# EAGLE board SmartTraffic (EAGLE 9.6.2)
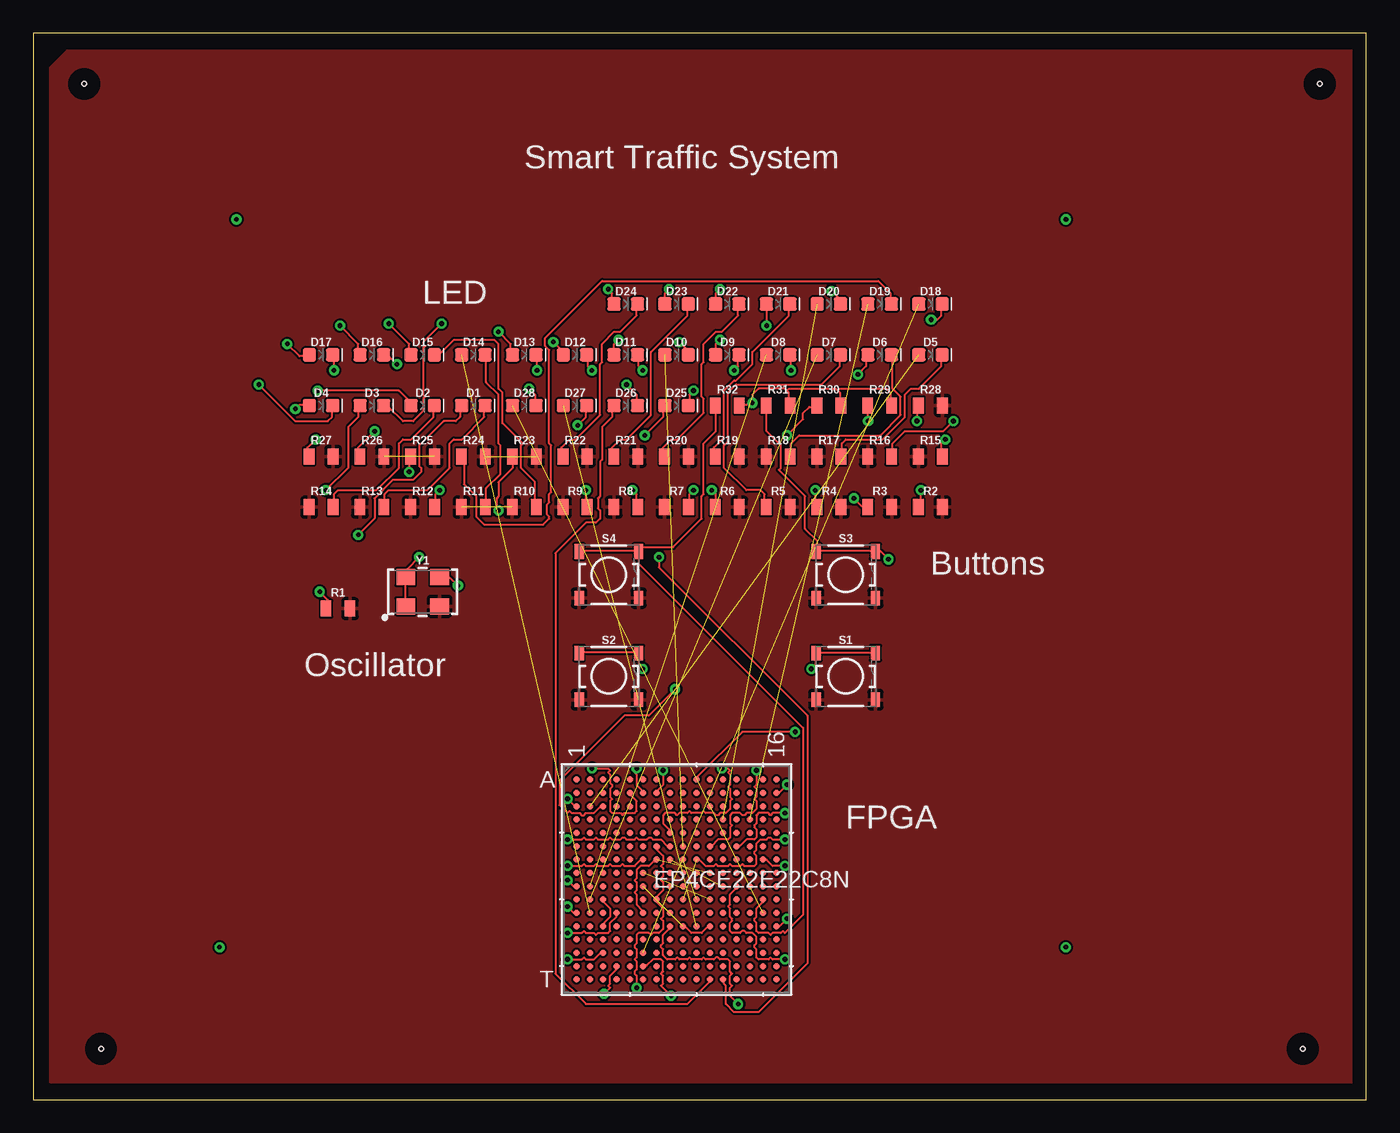
[diagram p0: board, top side]
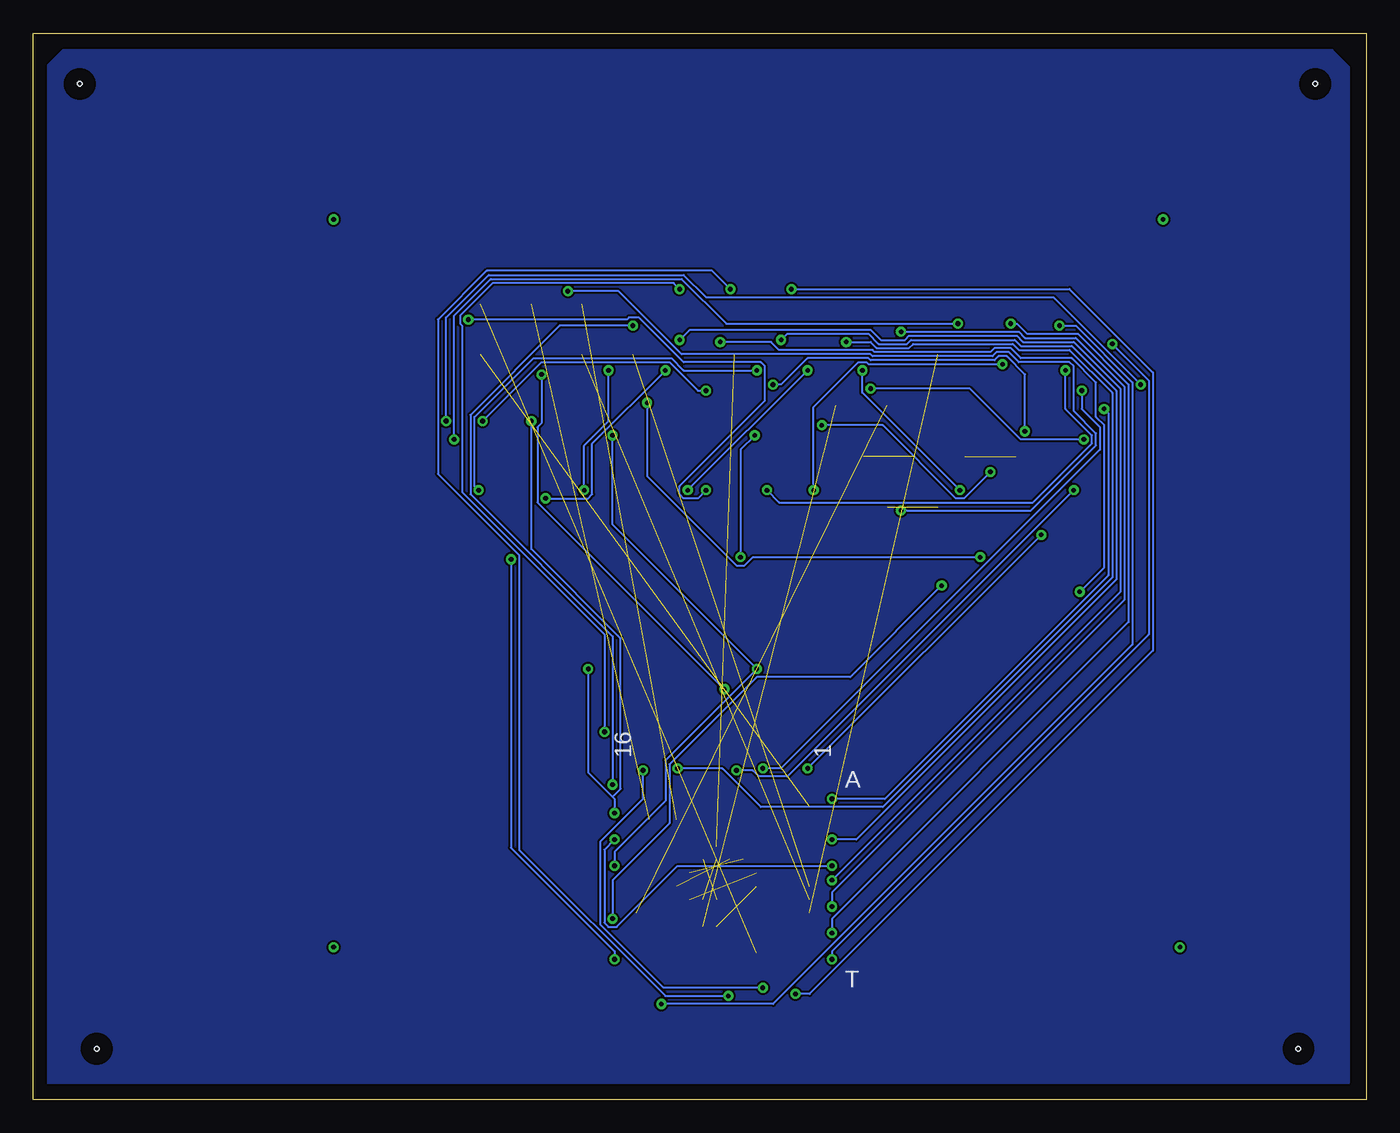
[diagram p1: board, bottom side, seen from below]

Size 100 x 80 mm. Coordinates in mm from the lower left corner, seen from the top.
Outline: 0,0 100,0 100,80 0,80 0,0
Copper layers (1*16): Top 0.035mm / dielectric 1.5mm / Bottom 0.035mm
Design rules "default": minimum track width 6mil, minimum drill 0.35mm, track to track 6mil, track to pad 6mil, pad to pad 6mil, via to via 6mil, smd to smd 6mil, copper to edge 40mil, drill to drill 6mil, minimum pad ring 10mil, minimum via ring 8mil, stop-mask expansion 4mil, vias tented up to drill 0mil, thermal gap 10mil
Holes 0.35 mm at 3.81,76.2 96.52,76.2 95.25,3.81 5.08,3.81

## Footprints (pad centres in the part's own frame; a part is rotated, then mirrored left to right if it is on the bottom)
LED-0603 = smd 1 x 1: A -0.877,0; C 0.877,0
0805 = smd 0.8 x 1.2: 1 -0.9,0; 2 0.9,0
TACTILE_SWITCH_SMD_4.5MM = smd 0.7 x 1.1: 1 2.225,1.75; 2 2.225,-1.75; 3 -2.225,-1.75; 4 -2.225,1.75
FBGA256_THIN_WIRE-BOND-A:1.55_ = smd 0.483 x 0.483: A1 -7.5,7.5; A2 -6.5,7.5; A3 -5.5,7.5; A4 -4.5,7.5; A5 -3.5,7.5; A6 -2.5,7.5; A7 -1.5,7.5; A8 -0.5,7.5; A9 0.5,7.5; A10 1.5,7.5; A11 2.5,7.5; A12 3.5,7.5; A13 4.5,7.5; A14 5.5,7.5; A15 6.5,7.5; A16 7.5,7.5; B1 -7.5,6.5; B2 -6.5,6.5; B3 -5.5,6.5; B4 -4.5,6.5; B5 -3.5,6.5; B6 -2.5,6.5; B7 -1.5,6.5; B8 -0.5,6.5; B9 0.5,6.5; B10 1.5,6.5; B11 2.5,6.5; B12 3.5,6.5; B13 4.5,6.5; B14 5.5,6.5; B15 6.5,6.5; B16 7.5,6.5; C1 -7.5,5.5; C2 -6.5,5.5; C3 -5.5,5.5; C4 -4.5,5.5; C5 -3.5,5.5; C6 -2.5,5.5; C7 -1.5,5.5; C8 -0.5,5.5; C9 0.5,5.5; C10 1.5,5.5; C11 2.5,5.5; C12 3.5,5.5; C13 4.5,5.5; C14 5.5,5.5; C15 6.5,5.5; C16 7.5,5.5; D1 -7.5,4.5; D2 -6.5,4.5; D3 -5.5,4.5; D4 -4.5,4.5; D5 -3.5,4.5; D6 -2.5,4.5; D7 -1.5,4.5; D8 -0.5,4.5; D9 0.5,4.5; D10 1.5,4.5; D11 2.5,4.5; D12 3.5,4.5; D13 4.5,4.5; D14 5.5,4.5; D15 6.5,4.5; D16 7.5,4.5; E1 -7.5,3.5; E2 -6.5,3.5; E3 -5.5,3.5; E4 -4.5,3.5; E5 -3.5,3.5; E6 -2.5,3.5; E7 -1.5,3.5; E8 -0.5,3.5; E9 0.5,3.5; E10 1.5,3.5; E11 2.5,3.5; E12 3.5,3.5; E13 4.5,3.5; E14 5.5,3.5; E15 6.5,3.5; E16 7.5,3.5; F1 -7.5,2.5; F2 -6.5,2.5; F3 -5.5,2.5; F4 -4.5,2.5; F5 -3.5,2.5; F6 -2.5,2.5; F7 -1.5,2.5; F8 -0.5,2.5; F9 0.5,2.5; F10 1.5,2.5; F11 2.5,2.5; F12 3.5,2.5; F13 4.5,2.5; F14 5.5,2.5; F15 6.5,2.5; F16 7.5,2.5; G1 -7.5,1.5; G2 -6.5,1.5; G3 -5.5,1.5; G4 -4.5,1.5; G5 -3.5,1.5; G6 -2.5,1.5; G7 -1.5,1.5; G8 -0.5,1.5; G9 0.5,1.5; G10 1.5,1.5; G11 2.5,1.5; G12 3.5,1.5; G13 4.5,1.5; G14 5.5,1.5; G15 6.5,1.5; G16 7.5,1.5; H1 -7.5,0.5; H2 -6.5,0.5; H3 -5.5,0.5; H4 -4.5,0.5; H5 -3.5,0.5; H6 -2.5,0.5; H7 -1.5,0.5; H8 -0.5,0.5; H9 0.5,0.5; H10 1.5,0.5; H11 2.5,0.5; H12 3.5,0.5; H13 4.5,0.5; H14 5.5,0.5; H15 6.5,0.5; H16 7.5,0.5; J1 -7.5,-0.5; J2 -6.5,-0.5; J3 -5.5,-0.5; J4 -4.5,-0.5; J5 -3.5,-0.5; J6 -2.5,-0.5; J7 -1.5,-0.5; J8 -0.5,-0.5; J9 0.5,-0.5; J10 1.5,-0.5; J11 2.5,-0.5; J12 3.5,-0.5; J13 4.5,-0.5; J14 5.5,-0.5; J15 6.5,-0.5; J16 7.5,-0.5; K1 -7.5,-1.5; K2 -6.5,-1.5; K3 -5.5,-1.5; K4 -4.5,-1.5; K5 -3.5,-1.5; K6 -2.5,-1.5; K7 -1.5,-1.5; K8 -0.5,-1.5; K9 0.5,-1.5; K10 1.5,-1.5; K11 2.5,-1.5; K12 3.5,-1.5; K13 4.5,-1.5; K14 5.5,-1.5; K15 6.5,-1.5; K16 7.5,-1.5; L1 -7.5,-2.5; L2 -6.5,-2.5; L3 -5.5,-2.5; L4 -4.5,-2.5; L5 -3.5,-2.5; L6 -2.5,-2.5; L7 -1.5,-2.5; L8 -0.5,-2.5; L9 0.5,-2.5; L10 1.5,-2.5; L11 2.5,-2.5; L12 3.5,-2.5; L13 4.5,-2.5; L14 5.5,-2.5; L15 6.5,-2.5; L16 7.5,-2.5; M1 -7.5,-3.5; M2 -6.5,-3.5; M3 -5.5,-3.5; M4 -4.5,-3.5; M5 -3.5,-3.5; M6 -2.5,-3.5; M7 -1.5,-3.5; M8 -0.5,-3.5; M9 0.5,-3.5; M10 1.5,-3.5; M11 2.5,-3.5; M12 3.5,-3.5; M13 4.5,-3.5; M14 5.5,-3.5; M15 6.5,-3.5; M16 7.5,-3.5; N1 -7.5,-4.5; N2 -6.5,-4.5; N3 -5.5,-4.5; N4 -4.5,-4.5; N5 -3.5,-4.5; N6 -2.5,-4.5; N7 -1.5,-4.5; N8 -0.5,-4.5; N9 0.5,-4.5; N10 1.5,-4.5; N11 2.5,-4.5; N12 3.5,-4.5; N13 4.5,-4.5; N14 5.5,-4.5; N15 6.5,-4.5; N16 7.5,-4.5; P1 -7.5,-5.5; P2 -6.5,-5.5; P3 -5.5,-5.5; P4 -4.5,-5.5; P5 -3.5,-5.5; P6 -2.5,-5.5; P7 -1.5,-5.5; P8 -0.5,-5.5; P9 0.5,-5.5; P10 1.5,-5.5; P11 2.5,-5.5; P12 3.5,-5.5; P13 4.5,-5.5; P14 5.5,-5.5; P15 6.5,-5.5; P16 7.5,-5.5; R1 -7.5,-6.5; R2 -6.5,-6.5; R3 -5.5,-6.5; R4 -4.5,-6.5; R5 -3.5,-6.5; R6 -2.5,-6.5; R7 -1.5,-6.5; R8 -0.5,-6.5; R9 0.5,-6.5; R10 1.5,-6.5; R11 2.5,-6.5; R12 3.5,-6.5; R13 4.5,-6.5; R14 5.5,-6.5; R15 6.5,-6.5; R16 7.5,-6.5; T1 -7.5,-7.5; T2 -6.5,-7.5; T3 -5.5,-7.5; T4 -4.5,-7.5; T5 -3.5,-7.5; T6 -2.5,-7.5; T7 -1.5,-7.5; T8 -0.5,-7.5; T9 0.5,-7.5; T10 1.5,-7.5; T11 2.5,-7.5; T12 3.5,-7.5; T13 4.5,-7.5; T14 5.5,-7.5; T15 6.5,-7.5; T16 7.5,-7.5
OSCILLATOR-SMD-5X3.2 = smd 1.397 x 1.194: 1 -1.27,-1.1; 2 1.27,-1.1; 3 1.27,1.1; 4 -1.27,1.1

## Placement (x,y rotation side)
D1  GREEN  [LED-0603]  33.02,52.07 0 top
D2  GREEN  [LED-0603]  29.21,52.07 0 top
D3  GREEN  [LED-0603]  25.4,52.07 0 top
D4  GREEN  [LED-0603]  21.59,52.07 0 top
D5  GREEN  [LED-0603]  67.31,55.88 0 top
D6  GREEN  [LED-0603]  63.5,55.88 0 top
D7  GREEN  [LED-0603]  59.69,55.88 0 top
D8  GREEN  [LED-0603]  55.88,55.88 0 top
D9  GREEN  [LED-0603]  52.07,55.88 0 top
D10  GREEN  [LED-0603]  48.26,55.88 0 top
D11  GREEN  [LED-0603]  44.45,55.88 0 top
D12  GREEN  [LED-0603]  40.64,55.88 0 top
D13  RED  [LED-0603]  36.83,55.88 0 top
D14  RED  [LED-0603]  33.02,55.88 0 top
D15  RED  [LED-0603]  29.21,55.88 0 top
D16  RED  [LED-0603]  25.4,55.88 0 top
D17  RED  [LED-0603]  21.59,55.88 0 top
D18  RED  [LED-0603]  67.31,59.69 0 top
D19  RED  [LED-0603]  63.5,59.69 0 top
D20  RED  [LED-0603]  59.69,59.69 0 top
D21  RED  [LED-0603]  55.88,59.69 0 top
D22  RED  [LED-0603]  52.07,59.69 0 top
D23  RED  [LED-0603]  48.26,59.69 0 top
D24  RED  [LED-0603]  44.45,59.69 0 top
D25  Yellow  [LED-0603]  48.26,52.07 0 top
D26  Yellow  [LED-0603]  44.45,52.07 0 top
D27  Yellow  [LED-0603]  40.64,52.07 0 top
D28  Yellow  [LED-0603]  36.83,52.07 0 top
R1  220  [0805]  22.86,36.83 0 top
R2  220  [0805]  67.31,44.45 0 top
R3  220  [0805]  63.5,44.45 0 top
R4  220  [0805]  59.69,44.45 0 top
R5  220  [0805]  55.88,44.45 0 top
R6  220  [0805]  52.07,44.45 0 top
R7  220  [0805]  48.26,44.45 0 top
R8  220  [0805]  44.45,44.45 0 top
R9  220  [0805]  40.64,44.45 0 top
R10  220  [0805]  36.83,44.45 0 top
R11  220  [0805]  33.02,44.45 0 top
R12  220  [0805]  29.21,44.45 0 top
R13  220  [0805]  25.4,44.45 0 top
R14  220  [0805]  21.59,44.45 0 top
R15  220  [0805]  67.31,48.26 0 top
R16  220  [0805]  63.5,48.26 0 top
R17  220  [0805]  59.69,48.26 0 top
R18  220  [0805]  55.88,48.26 0 top
R19  220  [0805]  52.07,48.26 0 top
R20  220  [0805]  48.26,48.26 0 top
R21  220  [0805]  44.45,48.26 0 top
R22  220  [0805]  40.64,48.26 0 top
R23  220  [0805]  36.83,48.26 0 top
R24  220  [0805]  33.02,48.26 0 top
R25  220  [0805]  29.21,48.26 0 top
R26  220  [0805]  25.4,48.26 0 top
R27  220  [0805]  21.59,48.26 0 top
R28  220  [0805]  67.31,52.07 0 top
R29  220  [0805]  63.5,52.07 0 top
R30  220  [0805]  59.69,52.07 0 top
R31  220  [0805]  55.88,52.07 0 top
R32  220  [0805]  52.07,52.07 0 top
S1  MOMENTARY-SWITCH-SPST-SMD-4.5MM  [TACTILE_SWITCH_SMD_4.5MM]  60.96,31.75 0 top
S2  MOMENTARY-SWITCH-SPST-SMD-4.5MM  [TACTILE_SWITCH_SMD_4.5MM]  43.18,31.75 0 top
S3  MOMENTARY-SWITCH-SPST-SMD-4.5MM  [TACTILE_SWITCH_SMD_4.5MM]  60.96,39.37 0 top
S4  MOMENTARY-SWITCH-SPST-SMD-4.5MM  [TACTILE_SWITCH_SMD_4.5MM]  43.18,39.37 0 top
U1  EP4CE22E22C8N  [FBGA256_THIN_WIRE-BOND-A:1.55_]  48.26,16.51 0 top
Y1  OSCILLATORSMD-5X3  [OSCILLATOR-SMD-5X3.2]  29.21,38.1 0 top

## Library data of the parts
D1-D12 = SparkFun-LED; PROD_ID: DIO-00821
D13-D24 = SparkFun-LED; PROD_ID: DIO-00819
D25-D28 = SparkFun-LED; PROD_ID: DIO-09003
R1-R32 = SparkFun-Resistors; PROD_ID: RES-09883
S1-S4 = SparkFun-Switches; PROD_ID: SWCH-09213
U1 = untitled; COPYRIGHT: Copyright (C) 2022 Ultra Librarian. All rights reserved.; MANUFACTURER_PART_NUMBER: EP4CE22E22C8N; MFR_NAME: Intel
Y1 = SparkFun-Clocks

## Nets
GND: R1.2 R2.2 R3.2 R4.2 R5.2 R6.2 R7.1 R8.1 R9.1 R10.1 R11.1 R12.1 R13.1 R14.1 R15.1 R16.1 R17.1 R18.1 R19.2 R20.2 R21.2 R22.2 R23.2 R24.2 R25.2 R26.2 R27.2 R28.2 S1.2 S1.3 S2.2 S2.3 S3.2 S3.3 S4.2 S4.3 Y1.2
N$1: D10.A U1.F9
N$2: D10.C R1.1
N$3: D3.A U1.B7
N$4: D3.C R15.2
N$5: D4.A U1.C1
N$6: D5.A U1.C2
N$7: D2.A U1.B6
N$8: D1.A U1.B5
N$9: D6.A U1.C3
N$10: D1.C R13.2
N$11: D2.C R14.2
N$12: D4.C R16.2
N$13: D5.C R17.2
N$14: D6.C R18.2
N$15: D11.A U1.F8
N$16: D12.A U1.E8
N$17: D12.C R6.1
N$18: D9.A U1.J1
N$19: D8.A U1.J2
N$20: D11.C R2.1
N$21: D9.C R3.1
N$22: D8.C R4.1
N$23: D7.C R5.1
N$24: D7.A U1.K2
N$25: D27.C R25.1
N$26: D27.A U1.M10
N$27: D25.A U1.T12
N$28: R29.1 S1.1 S1.4 U1.F13
N$29: R30.1 S2.1 S2.4 U1.G15
N$30: D16.A U1.M8
N$31: D17.A U1.P3
N$32: D18.A U1.P6
N$33: D15.A U1.L4
N$34: D14.A U1.L2
N$35: D13.A U1.L1
N$36: D13.C R12.2
N$37: D14.C R11.2
N$38: D15.C R10.2
N$39: D16.C R9.2
N$40: D17.C R8.2
N$41: D18.C R7.2
N$42: R31.1 S3.1 S3.4 U1.J13
N$43: R32.1 S4.1 S4.4 U1.K15
N$44: D26.A U1.T11
N$45: D24.A U1.R4
N$46: D23.A U1.R6
N$47: D22.A U1.A10
N$48: D21.A U1.B16
N$49: D20.A U1.D12
N$50: D19.A U1.D14
N$51: D22.C R20.1
N$52: D23.C R21.1
N$53: D24.C R22.1
N$54: D21.C R19.1
N$55: D20.C R23.1
N$56: D26.C R26.1
N$57: D19.C R24.1
N$58: U1.M16 Y1.3
N$64: D28.A U1.L15
N$65: D28.C R27.1
N$68: D25.C R28.1
VCC: R29.2 R30.2 R31.2 R32.2 Y1.1 Y1.4
VCCA1: U1.L5
VCCA2: U1.F12
VCCA3: U1.F5
VCCA4: U1.L12
VCCD_PLL1: U1.N4
VCCD_PLL2: U1.D13
VCCD_PLL3: U1.D4
VCCD_PLL4: U1.N13
VCCINT: U1.J6 U1.M9 U1.M11
VCCINT_2: U1.F7 U1.F11 U1.K7
VCCINT_3: U1.G6 U1.G10 U1.K9
VCCINT_4: U1.G7 U1.H11 U1.L6
VCCINT_5: U1.G8 U1.J12
VCCINT_6: U1.G9 U1.K10
VCCINT_7: U1.H6 U1.K11
VCCIO1: U1.G3
VCCIO1_2: U1.E3
VCCIO2: U1.K3 U1.M3
VCCIO3: U1.T1
VCCIO3_2: U1.P4
VCCIO3_3: U1.P7
VCCIO4: U1.T16
VCCIO4_2: U1.P10
VCCIO4_3: U1.P13
VCCIO5: U1.M14
VCCIO5_2: U1.K14
VCCIO6: U1.G14
VCCIO6_2: U1.E14
VCCIO7: U1.C13
VCCIO7_2: U1.A16
VCCIO7_3: U1.C10
VCCIO8: U1.C7
VCCIO8_2: U1.A1
VCCIO8_3: U1.C4

## Tracks (layer width: path | path; a pad name or v marks a point on that pad's centre or on a via)
GND  (3 unrouted)
  pour Top: 1.27,1.27 1.27,77.47 2.54,78.74 99.06,78.74 100.33,77.47 100.33,1.27
  pour Bottom: 1.27,1.27 1.27,77.47 2.54,78.74 97.79,78.74 99.06,77.47 99.06,1.27
  pour Bottom: 1.27,1.27 1.27,77.47 2.54,78.74 97.79,78.74 99.06,77.47 99.06,2.54 97.79,1.27
N$1  (1 unrouted)
N$2  (via drill 0.35)
  Top 0.152: v48.46,56.84 49.07,56.24 49.07,55.93 D10.C | v21.49,38.1 22.1,37.49 22.1,36.88 R1.1
  Bottom 0.152: v48.46,56.84 44.65,56.84 44.04,56.24 37.03,56.24 36.88,56.08 28.19,56.08 27.89,56.39 26.67,56.39 25.91,55.63 22.1,55.63 20.27,53.8 20.27,51.21 19.66,50.6 19.66,39.93 v21.49,38.1
N$3  (via drill 0.35)
  Top 0.152: v47.24,24.69 47.09,24.54 47.24,24.38 47.24,23.62 46.79,23.16 46.79,23.01 U1.B7 | v21.95,45.72 23.62,47.4 23.62,50.44 24.38,51.21 24.38,51.97 D3.A
  Bottom 0.152: v47.24,24.69 46.02,24.69 45.57,24.23 43.43,24.23 v21.95,45.72
N$4  (via drill 0.35)
  Top 0.152: v30.63,58.22 29.26,56.84 29.26,56.69 29.41,56.54 29.26,56.39 29.26,52.88 29.41,52.73 29.26,52.58 29.26,51.66 28.5,50.9 27.74,50.9 26.67,51.97 26.36,51.97 D3.C | v68.43,49.53 68.12,49.23 68.12,48.31 R15.2
  Bottom 0.152: v30.63,58.22 48.01,58.22 51.36,61.57 65.68,61.57 68.43,58.83 v68.43,49.53
N$5  (via drill 0.35)
  Top 0.152: v40.08,22.55 40.54,22.1 40.69,22.1 U1.C1 | v19.66,51.82 19.96,52.12 20.57,52.12 D4.A
  Bottom 0.152: v40.08,22.55 36.12,22.55 19.36,39.32 19.36,51.51 v19.66,51.82
N$6  (1 unrouted)
N$7  (via drill 0.35)
  Top 0.152: v45.26,24.84 45.26,24.69 45.11,24.54 45.26,24.38 45.26,23.62 45.72,23.16 45.72,23.01 U1.B6 | v21.34,53.19 27.43,53.19 28.19,52.43 28.19,52.12 D2.A
  Bottom 0.152: v45.26,24.84 43.89,24.84 19.96,48.77 19.96,50.44 21.34,51.82 v21.34,53.19
N$8  (via drill 0.35)
  Top 0.152: v41.91,24.84 43.13,24.84 43.28,24.69 43.13,24.54 43.28,24.38 43.28,23.77 43.43,23.62 43.43,23.47 43.28,23.32 43.28,22.71 43.43,22.55 43.28,22.4 43.28,21.64 43.43,21.49 44.04,21.49 44.2,21.34 44.35,21.49 45.11,21.49 45.26,21.64 45.26,22.4 44.81,22.86 U1.B5 | v24.38,42.37 25.6,43.59 25.6,45.11 26.98,46.48 28.5,46.48 29.11,47.09 29.11,47.4 28.96,47.55 28.96,49.07 30.79,50.9 31.7,50.9 32,51.21 32,51.97 D1.A
  Bottom 0.152: v24.38,42.37 v41.91,24.84
N$9  (via drill 0.35)
  Top 0.152: v48.16,30.79 46.18,28.8 44.35,28.8 39.47,23.93 39.47,22.1 40.08,21.49 40.23,21.64 40.39,21.49 41,21.49 41.15,21.34 41.3,21.34 41.45,21.49 42.06,21.49 42.52,21.95 42.67,21.95 U1.C3 | v61.87,54.41 62.48,55.02 62.48,55.78 D6.A
  Bottom 0.152: v48.16,30.79 62.18,44.81 62.18,50.44 61.87,50.75 v61.87,54.41
N$10
  Top 0.152: D1.C 33.83,51.97 33.83,51.21 32.16,49.53 31.55,49.53 31.24,49.23 31.24,47.4 29.57,45.72 26.67,45.72 26.36,45.41 26.36,44.5 R13.2
N$11
  Top 0.152: D2.C 30.02,51.97 30.02,51.21 28.35,49.53 27.74,49.53 27.43,49.23 27.43,47.4 25.76,45.72 22.86,45.72 22.55,45.41 22.55,44.5 R14.2
N$12  (via drill 0.35)
  Top 0.152: v16.92,53.65 19.66,50.9 22.1,50.9 22.4,51.21 22.4,51.97 D4.C | v69.04,50.9 68.28,50.14 65.38,50.14 64.47,49.23 64.47,48.31 R16.2
  Bottom 0.152: v16.92,53.65 23.47,60.2 49.53,60.2 51.21,61.87 65.84,61.87 69.04,58.67 v69.04,50.9
N$13
  Top 0.152: D5.C 68.12,55.78 68.12,55.02 66.45,53.34 65.84,53.34 65.38,52.88 65.38,51.21 63.7,49.53 60.96,49.53 60.66,49.23 60.66,48.31 R17.2
N$14
  Top 0.152: D6.C 64.47,55.78 64.47,53.34 65.08,52.73 65.08,51.36 63.55,49.84 57.45,49.84 56.84,49.23 56.84,48.31 R18.2
N$15  (via drill 0.35)
  Top 0.152: v40.08,19.51 40.23,19.66 40.39,19.51 41.15,19.51 41.3,19.66 41.45,19.51 42.06,19.51 42.22,19.66 42.37,19.51 43.13,19.51 43.28,19.66 43.43,19.51 44.04,19.51 44.2,19.66 44.35,19.66 44.5,19.51 45.11,19.51 45.26,19.66 45.41,19.51 46.02,19.51 46.18,19.66 46.33,19.66 46.48,19.51 47.09,19.51 47.55,19.05 47.7,19.05 U1.F8 | v43.89,57 43.59,56.69 43.59,55.93 D11.A
  Bottom 0.152: v40.08,19.51 38.25,19.51 18.75,39.01 18.75,53.19 22.1,56.54 25.91,56.54 26.36,57 34.14,57 34.44,56.69 36.58,56.69 37.34,57.45 43.43,57.45 v43.89,57
N$16  (via drill 0.35)
  Top 0.152: v51.66,24.84 52.12,24.84 52.27,24.69 52.12,24.54 52.27,24.38 52.27,23.62 52.12,23.47 52.27,23.32 52.27,22.71 52.43,22.55 52.27,22.4 52.27,21.79 51.97,21.49 51.51,21.49 51.36,21.34 51.21,21.34 51.05,21.49 50.44,21.49 50.29,21.64 50.14,21.49 49.38,21.49 49.23,21.64 49.07,21.49 48.46,21.49 48.31,21.34 48.16,21.49 47.4,21.49 47.24,21.34 47.24,20.73 47.7,20.27 47.7,20.12 U1.E8 | v39.01,56.84 39.62,56.24 39.62,55.93 D12.A
  Bottom 0.152: v51.66,24.84 48.31,24.84 45.41,21.95 36.27,21.95 19.05,39.17 19.05,53.03 22.25,56.24 26.06,56.24 26.52,56.69 33.98,56.69 34.29,56.39 36.73,56.39 37.19,56.84 v39.01,56.84
N$17  (via drill 0.35)
  Top 0.152: v41.91,54.71 41.6,55.02 41.6,55.78 D12.C | v50.9,45.72 51.21,45.41 51.21,44.5 R6.1
  Bottom 0.152: v50.9,45.72 v41.91,54.71
N$18  (via drill 0.35)
  Top 0.152: v40.08,16.46 40.54,16 40.69,16 U1.J1 | v51.51,57 51.21,56.69 51.21,55.93 D9.A
  Bottom 0.152: v40.08,16.46 18.44,38.1 18.44,53.34 21.95,56.84 25.76,56.84 26.21,57.3 34.29,57.3 34.59,57 36.42,57 37.19,57.76 50.75,57.76 v51.51,57
N$19  (1 unrouted)
N$20  (via drill 0.35)
  Top 0.152: v45.72,54.71 45.41,55.02 45.41,55.78 D11.C | v66.6,45.72 66.6,44.65 66.45,44.5 R2.1
  Bottom 0.152: v45.72,54.71 51.21,54.71 52.12,55.63 62.48,55.63 66.9,51.21 66.9,46.02 v66.6,45.72
N$21  (via drill 0.35)
  Top 0.152: v52.58,54.71 52.88,55.02 52.88,55.78 D9.C | v61.57,45.11 62.18,44.5 62.48,44.5 R3.1
  Bottom 0.152: v52.58,54.71 58.06,49.23 58.06,45.41 58.37,45.11 v61.57,45.11
N$22  (via drill 0.35)
  Top 0.152: v56.84,54.71 56.84,55.78 D8.C | v58.67,45.72 58.67,44.5 R4.1
  Bottom 0.152: v56.84,54.71 56.84,50.9 58.67,49.07 v58.67,45.72
N$23
  Top 0.152: D7.C 60.5,55.78 60.5,55.02 59.13,53.65 52.73,53.65 52.12,53.03 52.12,49.38 51.82,49.07 51.82,47.4 53.49,45.72 54.56,45.72 54.86,45.41 54.86,44.5 R5.1
N$24  (1 unrouted)
N$25  (via drill 0.35)
  Top 0.152: v40.84,50.6 41.45,51.21 41.45,51.97 D27.C | v28.19,47.09 28.19,48.16 R25.1
  Bottom 0.152: v40.84,50.6 36.27,50.6 30.79,45.11 30.18,45.11 v28.19,47.09
N$26  (1 unrouted)
N$27  (via drill 0.35)
  Top 0.152: v46.94,40.69 46.94,39.93 58.06,28.8 58.06,10.21 54.41,6.55 52.58,6.55 51.97,7.16 51.97,8.53 51.82,8.69 51.82,8.99 U1.T12 | v45.87,49.84 47.24,51.21 47.24,51.97 D25.A
  Bottom 0.152: v46.94,40.69 46.94,48.77 v45.87,49.84
N$28  (via drill 0.35)
  Top 0.152: v56.39,21.49 56.24,21.64 56.08,21.49 55.47,21.49 55.32,21.34 55.17,21.49 54.41,21.49 54.25,21.34 54.25,20.73 54.1,20.57 54.1,20.42 54.25,20.27 54.25,19.66 54.1,19.51 53.49,19.51 53.03,19.05 52.88,19.05 U1.F13 | v58.37,32.31 58.67,32.61 58.67,33.38 S1.4 58.83,33.53 63.09,33.53 S1.1 | v62.64,50.9 62.64,51.97 R29.1
  Bottom 0.152: v56.39,21.49 56.39,22.55 56.54,22.71 | 56.54,22.71 58.37,24.54 v58.37,32.31 | v62.64,50.9 62.64,41.3 55.93,34.59 55.93,23.32 56.54,22.71
N$29  (via drill 0.35)
  Top 0.152: v56.39,17.53 56.24,17.68 56.08,17.53 55.47,17.53 55.02,17.98 54.86,17.98 U1.G15 | v45.72,32.31 45.41,32.61 45.41,33.38 S2.1 45.26,33.53 41,33.53 S2.4 | v56.54,49.84 57.76,51.05 57.76,51.51 58.22,51.97 58.67,51.97 R30.1
  Bottom 0.152: v56.39,17.53 56.39,18.59 52.58,22.4 52.58,25.45 v45.72,32.31 56.54,43.13 v56.54,49.84
N$30  (via drill 0.35)
  Top 0.152: v52.88,7.16 52.27,7.77 52.27,8.38 52.43,8.53 52.27,8.69 52.27,9.3 52.43,9.45 52.27,9.6 52.27,10.36 52.12,10.52 51.51,10.52 51.36,10.67 51.21,10.67 51.05,10.52 50.44,10.52 50.29,10.67 50.14,10.52 49.38,10.52 49.23,10.67 49.07,10.52 48.46,10.52 48.31,10.67 48.16,10.52 47.55,10.52 47.24,10.82 47.24,11.28 47.09,11.43 47.09,11.58 47.24,11.73 47.24,12.34 47.7,12.8 47.7,12.95 U1.M8 | v23.01,58.06 24.38,56.69 24.38,55.93 D16.A
  Bottom 0.152: v52.88,7.16 44.5,7.16 17.53,34.14 17.53,53.8 21.79,58.06 v23.01,58.06
N$31  (via drill 0.35)
  Top 0.152: v40.08,10.52 40.23,10.67 40.39,10.52 41.15,10.52 41.3,10.67 41.45,10.52 42.06,10.52 42.52,10.97 42.67,10.97 U1.P3 | v19.05,56.69 19.96,55.78 20.57,55.78 D17.A
  Bottom 0.152: v40.08,10.52 40.08,11.12 16.31,34.9 16.31,53.95 v19.05,56.69
N$32  (1 unrouted)
N$33  (via drill 0.35)
  Top 0.152: v40.08,12.5 40.23,12.65 40.39,12.5 41.15,12.5 41.3,12.65 41.45,12.5 42.06,12.5 42.22,12.34 42.37,12.5 43.13,12.5 43.28,12.65 43.28,13.26 43.74,13.72 43.74,13.87 U1.L4 | v26.67,58.22 28.19,56.69 28.19,55.93 D15.A
  Bottom 0.152: v40.08,12.5 40.08,13.56 17.83,35.81 17.83,53.65 21.64,57.45 25.45,57.45 26.21,58.22 v26.67,58.22
N$34  (1 unrouted)
N$35  (via drill 0.35)
  Top 0.152: v40.08,14.48 40.54,14.02 40.69,14.02 U1.L1 | v34.9,57.61 35.81,56.69 35.81,55.93 D13.A
  Bottom 0.152: v40.08,14.48 40.08,15.54 18.14,37.49 18.14,53.49 21.79,57.15 25.6,57.15 26.06,57.61 v34.9,57.61
N$36  (via drill 0.35)
  Top 0.152: v37.8,54.71 37.8,55.78 D13.C | v30.48,45.72 30.18,45.41 30.18,44.5 R12.2
  Bottom 0.152: v37.8,54.71 37.8,53.03 v30.48,45.72
N$37
  Top 0.152: D14.C 33.98,55.78 33.98,53.8 34.9,52.88 34.9,49.23 35.05,49.07 35.05,46.94 33.98,45.87 33.98,44.5 R11.2
N$38
  Top 0.152: D15.C 30.18,55.93 30.48,55.93 31.55,57 34.59,57 34.9,56.69 34.9,53.34 35.2,53.03 35.2,50.75 36.73,49.23 36.58,49.07 36.58,47.4 37.64,46.33 37.64,44.5 R10.2
N$39  (via drill 0.35)
  Top 0.152: v27.28,55.17 26.67,55.78 26.36,55.78 D16.C | v41.45,45.72 41.45,44.5 R9.2
  Bottom 0.152: v27.28,55.17 37.34,55.17 37.49,55.32 38.1,55.32 41.45,51.97 v41.45,45.72
N$40  (via drill 0.35)
  Top 0.152: v22.55,54.71 22.55,55.78 D17.C | v44.96,45.72 45.26,45.41 45.26,44.5 R8.2
  Bottom 0.152: v22.55,54.71 22.55,51.82 20.57,49.84 20.57,49.23 24.99,44.81 44.04,44.81 v44.96,45.72
N$41  (via drill 0.35)
  Top 0.152: v67.36,58.52 67.82,58.52 68.12,58.83 68.12,59.59 D18.C | v49.53,45.72 49.23,45.41 49.23,44.5 R7.2
  Bottom 0.152: v67.36,58.52 55.47,58.52 55.32,58.67 54.56,58.67 51.21,55.32 45.41,55.32 45.11,55.02 45.11,52.43 51.51,46.02 51.51,45.41 51.21,45.11 50.14,45.11 v49.53,45.72
N$42  (via drill 0.35)
  Top 0.152: v56.39,10.52 56.24,10.67 56.08,10.52 55.47,10.52 55.32,10.67 55.17,10.52 54.41,10.52 54.25,10.67 54.25,11.28 54.1,11.43 54.1,11.58 54.25,11.73 54.25,12.19 53.95,12.5 53.49,12.5 53.34,12.65 53.19,12.65 53.03,12.5 52.43,12.5 52.27,12.65 52.27,13.26 52.43,13.41 52.43,13.56 52.27,13.72 52.27,14.33 52.12,14.48 52.27,14.63 52.27,15.39 52.73,15.85 52.73,16 U1.J13 | v64.16,40.54 63.55,41.15 63.25,41.15 S3.1 63.09,41.15 58.83,41.15 | 58.83,41.15 58.83,41.91 57.91,42.82 57.91,45.26 55.93,47.24 56.08,47.4 56.08,49.07 55.02,50.14 55.02,51.97 R31.1 | 58.83,41.15 S3.4
  Bottom 0.152: v56.39,10.52 56.39,11.12 64.16,18.9 v64.16,40.54
N$43
  Top 0.152: U1.K15 54.71,14.94 54.71,14.78 54.25,14.33 54.25,13.72 54.1,13.56 54.1,13.41 54.25,13.26 54.25,12.65 54.41,12.5 55.17,12.5 55.32,12.34 55.47,12.5 56.08,12.5 56.24,12.65 56.39,12.5 57.76,13.87 57.76,27.89 45.41,40.23 45.41,41 S4.1 | S4.4 41,41.15 45.26,41.15 S4.1 | R32.1 51.21,51.97 51.21,50.14 50.29,49.23 50.29,45.41 50.14,45.26 50.14,43.59 48.01,41.45 45.72,41.45 45.41,41.15 S4.1
N$44
  Top 0.152: U1.T11 50.75,8.99 50.75,8.84 49.07,7.16 41.45,7.16 39.17,9.45 39.17,41 41.45,43.28 42.22,43.28 42.52,43.59 42.52,44.2 42.37,44.35 42.37,45.11 42.52,45.26 42.52,47.85 42.67,48.01 42.67,50.44 43.43,51.21 43.43,51.97 D26.A
N$45  (via drill 0.35)
  Top 0.152: v42.82,7.92 43.28,8.38 43.13,8.53 43.28,8.69 43.28,9.3 43.74,9.75 43.74,9.91 U1.R4 | v43.13,60.81 43.43,60.5 43.43,59.74 D24.A
  Bottom 0.152: v42.82,7.92 41.76,7.92 16,33.68 16,54.56 22.25,60.81 v43.13,60.81
N$46  (via drill 0.35)
  Top 0.152: v47.85,7.77 47.09,8.53 47.24,8.69 47.24,9.3 47.09,9.45 47.24,9.6 47.24,10.36 47.09,10.52 46.48,10.52 46.02,10.06 45.87,10.06 U1.R6 | v47.7,60.81 47.4,60.5 47.4,59.74 D23.A
  Bottom 0.152: v47.85,7.77 52.58,7.77 63.55,18.75 63.55,40.84 69.65,46.94 69.65,58.52 65.99,62.18 49.07,62.18 v47.7,60.81
N$47  (via drill 0.35)
  Top 0.152: v57.15,27.58 53.19,27.58 49.84,24.23 49.84,24.08 U1.A10 | v51.51,60.81 51.21,60.5 51.21,59.74 D22.A
  Bottom 0.152: v57.15,27.58 57.15,34.9 67.82,45.57 67.82,58.06 67.97,58.22 67.97,58.83 65.53,61.27 51.97,61.27 v51.51,60.81
N$48  (via drill 0.35)
  Top 0.152: v56.54,23.62 55.93,23.01 55.78,23.01 U1.B16 | v55.02,58.06 55.02,59.59 D21.A
  Bottom 0.152: v56.54,23.62 56.54,34.75 67.21,45.41 67.21,51.36 60.5,58.06 v55.02,58.06
N$49  (1 unrouted)
N$50  (1 unrouted)
N$51
  Top 0.152: D22.C 52.88,59.59 52.88,58.83 51.66,57.61 51.21,57.61 50.29,56.69 50.29,55.32 50.14,55.17 50.14,52.73 50.29,52.58 50.29,51.51 48.31,49.53 47.85,49.53 47.24,48.92 47.24,48.31 R20.1
N$52
  Top 0.152: D23.C 49.07,59.59 49.07,58.83 46.33,56.08 46.33,51.36 44.5,49.53 44.04,49.53 43.43,48.92 43.43,48.31 R21.1
N$53
  Top 0.152: D24.C 45.26,59.59 45.26,58.83 44.04,57.61 43.59,57.61 42.67,56.69 42.67,55.32 42.52,55.17 42.52,51.36 40.69,49.53 40.23,49.53 39.62,48.92 39.62,48.31 R22.1
N$54
  Top 0.152: D21.C 56.69,59.59 56.69,58.83 53.95,56.08 53.95,55.17 52.73,53.95 52.58,53.95 51.82,53.19 51.82,49.68 51.05,48.92 51.05,48.31 R19.1
N$55  (via drill 0.35)
  Top 0.152: v59.89,60.66 60.5,60.05 60.5,59.74 D20.C | v34.9,44.2 34.75,44.35 34.75,45.11 34.9,45.26 34.9,46.33 35.97,47.4 35.97,48.16 R23.1
  Bottom 0.152: v59.89,60.66 56.08,60.66 51.36,55.93 37.19,55.93 37.03,55.78 28.04,55.78 27.74,56.08 26.82,56.08 26.06,55.32 22.25,55.32 21.95,55.02 21.95,51.66 20.27,49.99 20.27,49.07 25.15,44.2 v34.9,44.2
N$56  (via drill 0.35)
  Top 0.152: v44.5,53.65 45.26,52.88 45.26,52.12 D26.C | v25.6,50.14 24.38,48.92 24.38,48.31 R26.1
  Bottom 0.152: v44.5,53.65 43.89,53.65 41.91,55.63 37.34,55.63 37.19,55.47 27.89,55.47 27.58,55.78 26.98,55.78 25.6,54.41 v25.6,50.14
N$57
  Top 0.152: D19.C 64.31,59.74 64.31,60.5 63.4,61.42 42.67,61.42 38.41,57.15 38.41,56.54 38.71,56.24 38.71,49.23 38.86,49.07 38.86,45.57 38.71,45.41 38.71,44.81 38.56,44.65 38.56,43.89 38.71,43.74 38.71,43.59 38.25,43.13 33.83,43.13 33.22,43.74 33.22,45.26 32.31,46.18 32.31,48.01 32.16,48.16 R24.1
N$58  (via drill 0.35)
  Top 0.152: v56.54,13.56 55.93,12.95 55.78,12.95 U1.M16 | v31.85,38.56 31.24,39.17 30.48,39.17 Y1.3
  Bottom 0.152: v56.54,13.56 56.54,16.46 52.27,20.73 52.27,25.15 45.72,31.7 38.71,31.7 v31.85,38.56
N$59  (via drill 0.35)
  other vias: 15.24,66.04
N$60  (via drill 0.35)
  other vias: 77.47,66.04
N$61  (via drill 0.35)
  other vias: 13.97,11.43
N$62  (via drill 0.35)
  other vias: 77.47,11.43
N$64  (1 unrouted)
N$65  (via drill 0.35)
  Top 0.152: v37.19,53.34 37.64,52.88 37.64,52.12 D28.C | v21.18,49.53 20.57,48.92 20.57,48.31 R27.1
  Bottom 0.152: v37.19,53.34 29.72,53.34 25.91,49.53 v21.18,49.53
N$68  (via drill 0.35)
  Top 0.152: v49.53,53.19 49.23,52.88 49.23,52.12 D25.C | v66.29,50.9 66.29,51.97 R28.1
  Bottom 0.152: v49.53,53.19 50.14,53.19 52.27,55.32 61.87,55.32 v66.29,50.9
VCC  (via drill 0.35)
  Top 0.152: Y1.1 27.89,37.03 27.89,39.17 Y1.4 28.04,39.32 28.04,39.78 v28.96,40.69 | 53.8,52.43 53.95,52.58 53.95,52.88 54.41,53.34 56.39,53.34 56.54,53.19 | 53.8,52.43 53.49,52.12 53.03,52.12 R32.2 | 56.54,53.19 56.69,53.03 56.69,52.12 R31.2 | 60.35,53.19 60.2,53.34 56.69,53.34 56.54,53.19 | 60.35,53.19 60.5,53.03 60.5,52.12 R30.2 | 60.35,53.19 60.5,53.34 64.01,53.34 64.31,53.03 64.31,52.12 R29.2 | 53.8,52.43 v53.95,52.27
  Bottom 0.152: v28.96,40.69 46.02,40.69 46.63,40.08 47.24,40.08 53.95,46.79 v53.95,52.27
VCCINT  (1 unrouted)
  Top 0.152: U1.M9 48.77,12.95 48.92,12.95 49.38,12.5 50.14,12.5 50.75,13.11 U1.M11
VCCINT_2  (via drill 0.35)
  Top 0.152: U1.F7 46.79,19.05 46.94,19.05 46.94,18.9 46.79,18.75 47.24,18.29 47.24,17.68 47.09,17.53 47.24,17.37 47.24,16.76 47.09,16.61 47.09,16.46 47.24,16.31 47.24,15.7 46.79,15.24 46.79,15.09 U1.K7 46.63,14.94 47.24,14.33 47.24,13.72 47.09,13.56 47.24,13.41 47.24,12.8 46.94,12.5 46.48,12.5 46.33,12.34 46.18,12.5 45.41,12.5 45.26,12.34 45.26,11.73 45.11,11.58 45.11,11.43 45.26,11.28 45.26,10.67 45.11,10.52 45.26,10.36 45.26,9.75 45.11,9.6 45.11,9.45 45.26,9.3 v45.26,8.38 | v54.25,24.69 54.1,24.54 54.25,24.38 54.25,23.62 54.1,23.47 54.25,23.32 54.25,22.71 54.1,22.55 54.25,22.4 54.25,21.79 53.95,21.49 53.49,21.49 53.34,21.34 53.19,21.34 53.03,21.49 52.43,21.49 52.27,21.34 52.27,20.73 52.43,20.57 52.27,20.42 52.27,19.66 52.12,19.51 51.36,19.51 50.9,19.05 U1.F11
  Bottom 0.152: v54.25,24.69 54.25,22.55 57.45,19.36 57.45,13.11 52.73,8.38 v45.26,8.38
VCCINT_3  (via drill 0.35)  (1 unrouted)
  Top 0.152: v40.08,17.53 40.23,17.68 40.39,17.53 41.15,17.53 41.3,17.68 41.45,17.53 42.06,17.53 42.22,17.68 42.37,17.53 43.13,17.53 43.28,17.68 43.43,17.53 44.04,17.53 44.2,17.68 44.35,17.53 45.11,17.53 45.57,17.98 45.72,17.98 U1.G6 | v56.39,19.51 56.24,19.66 56.08,19.51 55.47,19.51 55.32,19.66 55.17,19.66 55.02,19.51 54.56,19.51 54.25,19.2 54.25,18.75 54.1,18.59 54.1,18.44 54.25,18.29 54.25,17.68 54.1,17.53 53.34,17.53 53.19,17.68 53.03,17.53 52.43,17.53 52.27,17.68 52.12,17.53 51.36,17.53 51.21,17.68 51.05,17.53 50.44,17.53 49.84,18.14 U1.G10
  Bottom 0.152: v40.08,17.53 51.66,17.53 56.24,12.95 56.84,12.95 57.15,13.26 57.15,18.75 v56.39,19.51
VCCINT_4  (1 unrouted)
  Top 0.152: U1.L6 45.72,14.02 45.72,14.17 45.26,14.63 45.26,15.39 45.11,15.54 45.26,15.7 45.26,16.31 45.11,16.46 45.26,16.61 45.26,17.22 45.57,17.53 46.18,17.53 46.48,17.83 46.79,17.83 46.79,17.98 U1.G7
VCCINT_5  (1 unrouted)
VCCINT_6  (1 unrouted)
VCCINT_7  (1 unrouted)
VCCIO2
  Top 0.152: U1.M3 42.82,13.11 42.82,13.26 43.28,13.72 43.28,14.33 42.67,14.94 U1.K3

## Text on the board
tNames: Smart Traffic System | LED | Buttons | Oscillator | FPGA